# Altium PCB ACF_PCB.PcbDoc
Units mil, origin at the board's own origin, x right, y up, seen from the top; angles counter-clockwise.
Board outline 6000 x 4000 mil, 4 copper layers (Top Layer, Layer 1, Layer 2, Bottom Layer), stack 23.712 mil thick; 82 components, 43 nets, 231 pads, 0 vias.
Unrouted connection lines stored in the file: 172.
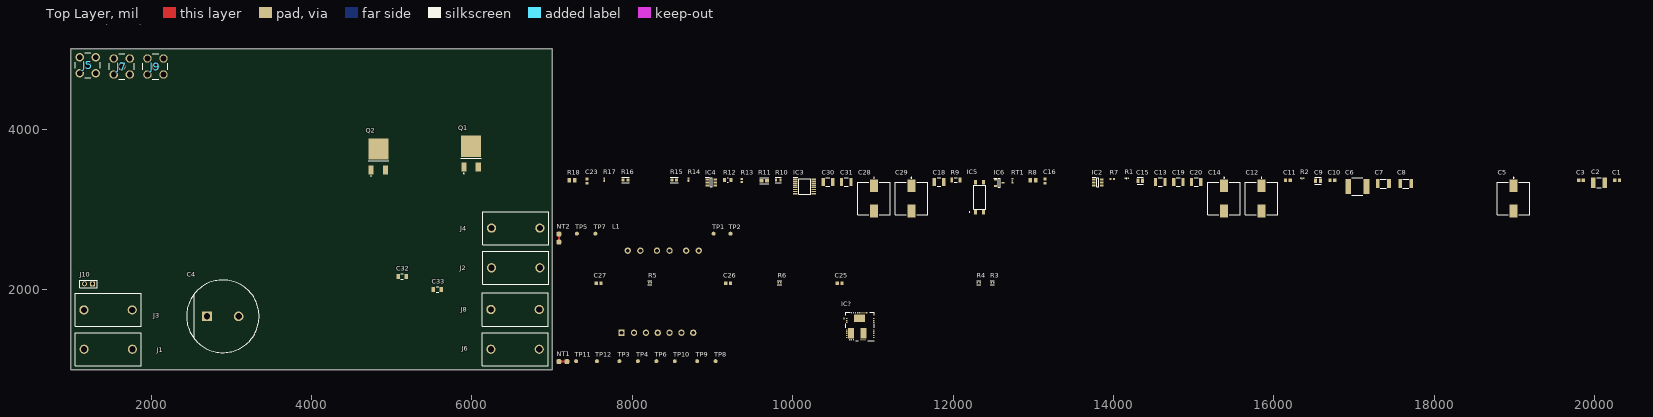
[diagram p0: Top Layer view]
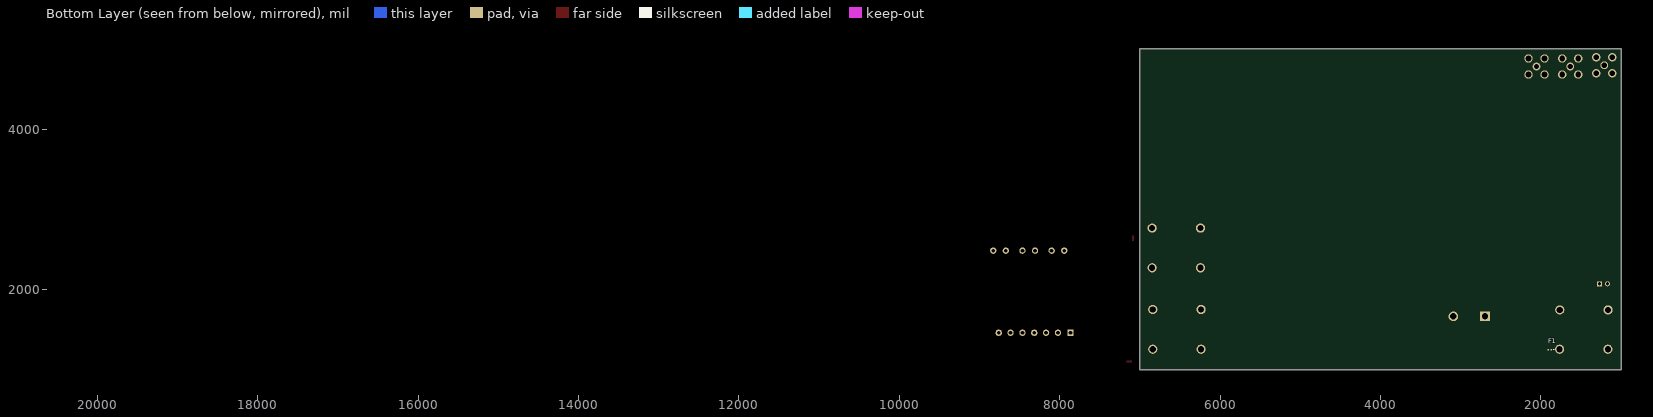
[diagram p1: Bottom Layer view, seen from below]

## Layer stack, top to bottom
Top Solder: solder mask 0.4, Solder Resist, Dk 3.5
Top Layer: signal copper 1.378
Dielectric 2: prepreg 2.8, PP-006, Dk 4.1
Layer 1: signal copper 1.378
Dielectric 1: dielectric 12.6, FR-4, Dk 4.8
Layer 2: signal copper 1.378
Dielectric 3: prepreg 2.8, PP-006, Dk 4.1
Bottom Layer: signal copper 1.378
Bottom Solder: solder mask 0.4, Solder Resist, Dk 3.5

## Board outline
1000,1000 7000,1000 7000,5000 1000,5000

## Design rules (kind name [scope] priority, off if disabled: settings)
Clearance [All] p1: gap=10 ignorepadtopadclearanceinfootprint=FALSE except(0: Arc-Hole Track-Hole SMDPad-Hole THPad-Hole Via-Hole Fill-Hole Poly-Hole Region-Hole Text-Hole)
PolygonConnect [All] p1: connectstyle=Relief reliefconductorwidth=10 reliefentries=4 polygonreliefangle="90 Angle" airgapwidth=10
RoomDefinition main [InComponentClass('main')] p1: confinementstyle=ConfineIn formatcopy=TRUE lockcomponents=FALSE outline 0,0 2000,0 2000,1000 0,1000
RoomDefinition in_out [InComponentClass('in_out')] p2: confinementstyle=ConfineIn formatcopy=TRUE lockcomponents=FALSE outline 0,0 2000,0 2000,1000 0,1000
RoutingVias [All] p1: holewidth=28 width=50 viastyle="Through Hole" minholewidth=28 minwidth=50 maxholewidth=28 maxwidth=50
SolderMaskExpansion [All] p1: expansion=4 istentingtop=FALSE
Width [All] p1: maxlimit=10 minlimit=10 preferedwidth=10
30 further rules are at their usual default settings.

## Classes and differential pairs
component class main: C1 C2 C3 C4 C5 C6 C7 C8 C9 C10 C11 C12 C13 C14 C15 C16 C17 C18 C19 C20 C21 C22 C23 C24 C28 C29 C30 C31 D1 IC2 IC3 IC4 IC5 IC6 IC? L1 NT2 Q1 Q2 R1 R2 R7 R8 R9 R10 R11 R12 R13 R14 R15 R16 R17 R18 RT1 TP1 TP2 TP5 TP7
component class in_out: C25 C26 C27 C32 C33 D2 D3 D4 F1 J1 J2 J3 J4 J5 J6 J7 J8 J9 J10 NT1 R3 R4 R5 R6 TP3 TP4 TP6 TP8 TP9 TP10 TP11 TP12

## Components (designator, comment, footprint, x,y, rotation, side; value= is the part's Value field where it differs from the comment)
C1 "0.1uF" CAPC1608X87X35ML15T15 20280,3360 r0 top
C2 "470nF/450V" CAPC4532X155X60LL30T35 20055,3330 r0 top
C3 "0.1uF" CAPC1608X87X35ML15T15 19830,3360 r0 top
C4 "100uF/450V" FP-EET-HC2G101BA-MFG 2895,1665 r0 top
C5 "10uF/450V" NIC-ULT2G100MNL1GS-2_V 18990,3135 r0 top
C6 "2.2uF//450V" FP-CKG57NX7T2W225M500JH-MFG 17040,3285 r0 top
C7 "100nF//450V" FP-CGA6P-IPC_A 17365,3320 r0 top
C8 "100nF/450V" FP-CGA6P-IPC_A 17645,3320 r0 top
C9 "10uF" FP-C0805C106K4PACTU-MFG 16550,3355 r0 top
C10 "0.1uF" CAPC1608X87X35ML15T15 16730,3360 r0 top
C11 "0.1uF" CAPC1608X87X35ML15T15 16175,3360 r0 top
C12 "470uF/35V" NIC-ULT2G100MNL1GS-2_V 15845,3135 r0 top
C13 "12105C105KAT2A" FP-1210-L_3_3_0_4-W_2_5_0-MFG 14585,3340 r0 top
C14 "470uF/35V" NIC-ULT2G100MNL1GS-2_V 15380,3135 r0 top
C15 "10uF" FP-C0805C106K4PACTU-MFG 14335,3355 r0 top
C16 "GRM1885C1H101JA01D" CAPC1608X90X35NL10T15 13145,3350 r90 top
C18 "12105C105KAT2A" FP-1210-L_3_3_0_4-W_2_5_0-MFG 11825,3340 r0 top
C19 "4.7uF/35V" FP-1210-L_3_3_0_4-W_2_5_0-MFG 14810,3340 r0 top
C20 "4.7uF/35V" FP-1210-L_3_3_0_4-W_2_5_0-MFG 15030,3340 r0 top
C23 "GRM1885C1H101JA01D" CAPC1608X90X35NL10T15 7435,3350 r90 top
C25 "0.1uF" CAPC1608X87X35ML15T15 10585,2075 r0 top
C26 "0.1uF" CAPC1608X87X35ML15T15 9195,2075 r0 top
C27 "0.1uF" CAPC1608X87X35ML15T15 7580,2075 r0 top
C28 "470uF/35V" NIC-ULT2G100MNL1GS-2_V 11015,3135 r0 top
C29 "470uF/35V" NIC-ULT2G100MNL1GS-2_V 11480,3135 r0 top
C30 "4.7uF/35V" FP-1210-L_3_3_0_4-W_2_5_0-MFG 10440,3340 r0 top
C31 "4.7uF/35V" FP-1210-L_3_3_0_4-W_2_5_0-MFG 10670,3340 r0 top
C32 "220p/500V" FP-CL31-IPC_C 5129.75,2160 r0 top
C33 "220p/500V" FP-CL31-IPC_C 5569.75,2000 r0 top
F1 "ERB-RD0R50X" ERBRD0R63X 1890,1250 r0 bottom
IC2 "SRK1000" SOT95P280X145-6N 13805,3335 r0 top
IC3 "NCP1568S02DBR2G" SOP65P640X135-16N 10150,3285 r0 top
IC4 "SRK1000" SOT95P280X145-6N 8985,3335 r0 top
IC5 "FODM1009R2V" FODM1009R2V 12330,3150 r0 top
IC6 "NCP431AVSNT1G" SOT96P237X111-3N 12575,3330 r0 top
IC? "MASTERGAN1" MASTERGAN1 10841.5,1540.2 r0 top
J1 "571-0100" 5710100 1165,1255 r0 top
J2 "571-0100" 5710100 6847.36,2270 r180 top
J3 "571-0100" 5710100 1162.64,1745 r0 top
J4 "571-0100" 5710100 6847.36,2765 r180 top
J5 "142-0701-301" 1420701301 1210,4795 r90 top
J6 "571-0100" 5710100 6840,1255 r180 top
J7 "142-0701-301" 1420701301 1635,4780 r90 top
J8 "571-0100" 5710100 6840,1750 r180 top
J9 "142-0701-301" 1420701301 2055,4780 r90 top
J10 "SSW-102-02-T-S" SMTC-SSW-102-02-X-S 1270,2070 r180 top
L1 "TI­E25­2x14­86W" TI­E25­2x14­86W 7865,1460 r90 top
NT1 "Net tie" "Net tie" 7085,1100 r0 top net-tie
NT2 "Net tie" "Net tie" 7085,2590 r90 top net-tie
Q1 "STD95N4F3" STD95N4F3 5990,3877.52 r0 top
Q2 "STD95N4F3" STD95N4F3 4835,3842.52 r0 top
R1 "" RESC0402(1005)_L 14165,3385 r0 top value=1k
R2 "20mR" RESC0402(1005)_L 16355,3385 r0 top value=1k
R3 "4.7k" FP-RG1005-IPC_C 12490,2085 r0 top
R4 "4.7k" FP-RG1005-IPC_C 12320,2085 r0 top
R5 "4.7k" FP-RG1005-IPC_C 8220,2085 r0 top
R6 "4.7k" FP-RG1005-IPC_C 9835,2085 r0 top
R7 "ERJ2RKF3300X" RESC1005X40X25ML05T05 13985,3380 r0 top
R8 "ERJ6ENF6802V" RESC2013X70X40NL20T20 12995,3360 r0 top
R9 "ERJ-8ENF1001V" RESC3216X70X50LL05T20 12035,3365 r0 top
R10 "1k" FP-RC0603-0_55-IPC_C 9820,3365 r0 top
R11 "13k" FP-ERA3A-IPC_A 9645,3355 r0 top
R12 "100k" FP-RN732A-MFG 9190,3365 r0 top value=100KΩ
R13 "ERJ2RKF3300X" RESC1005X40X25ML05T05 9365,3360 r90 top
R14 "" RESC0402(1005)_L 8700,3370 r90 top value=1k
R15 "56k" FP-ERJ3EK-IPC_B 8525,3365 r0 top
R16 "47k" FP-ERJ3G-IPC_B 7915,3365 r0 top
R17 "" RESC0402(1005)_L 7650,3370 r90 top value=1k
R18 "ERJ6ENF6802V" RESC2013X70X40NL20T20 7250,3360 r0 top
RT1 "NTCG104EF104FT1SX" THRMC1005X55N 12740,3355 r90 top
TP1 "*" "Test point" 9015,2695 r90 top
TP2 "*" "Test point" 9225,2695 r90 top
TP3 "Test point" "Test point" 7840,1105 r90 top
TP4 "Test point" "Test point" 8070,1105 r90 top
TP5 "*" "Test point" 7310,2695 r90 top
TP6 "Test point" "Test point" 8300,1105 r90 top
TP7 "*" "Test point" 7540,2695 r90 top
TP8 "Test point" "Test point" 9040,1105 r90 top
TP9 "Test point" "Test point" 8810,1105 r90 top
TP10 "Test point" "Test point" 8530,1105 r90 top
TP11 "Test point" "Test point" 7300,1105 r90 top
TP12 "Test point" "Test point" 7560,1105 r90 top

## Footprints (in the part's own frame and the unit in brackets; to place one, negate y for a bottom-side part, rotate by r counter-clockwise, add the part's x,y. Pads: shape width x height; smd on the part's side, far side on the other; paste and mask are expansions set on the pad)
5710100 [mm]
  round 2.91 hole 1.94: 1(0,0) 2(15.3,0)
  silkscreen extent -2.8,-5.25 18.1,5.25, body extent -5.19,-5.61 18.11,4.89, height 12.4
1420701301 [mil]
  round 97.52 hole 65: 1(0,0)
  round 105 hole 70: 2(-100,100) 3(-100,-100) 4(100,-100) 5(100,100)
  silkscreen extent -156,-156 156,156, body extent -150,-156 466,156, height 378
CAPC1608X87X35ML15T15 [mm] "Chip Capacitor, 2-Leads, Body 1.60x0.80mm, IPC Low Density"
  rect 1x1.1 smd: 1(-0.725,0) 2(0.725,0)
  body extent -0.87,-0.48 0.87,0.47, height 0.87
CAPC1608X90X35NL10T15 [mm] "Chip Capacitor, 2-Leads, Body 1.60x0.80mm, IPC Medium Density"
  rect 0.85x0.95 smd: 1(-0.675,0) 2(0.675,0)
  body extent -0.85,-0.45 0.85,0.45, height 0.9
CAPC4532X155X60LL30T35 [mm] "Chip Capacitor, 2-Leads, Body 4.8x3.5mm, IPC High Density"
  rect 1.4x3.4 smd: 1(-1.85,0) 2(1.85,0)
  silkscreen extent -0.75,-1.6 0.75,1.6, body extent -2.4,-1.75 2.4,1.75, height 1.55
ERBRD0R63X [mm]
  rect 0.475x0.5 smd: 1(-0.513,0) 2(0.513,0)
  silkscreen extent -1.3,-0.05 -1.2,0.05, body extent -0.7,-0.25 0.7,0.25, height 0.59
FODM1009R2V [mm]
  rect 0.9x1.3 smd: 1(-1.27,-4.75) 2(1.27,-4.75) 3(1.27,4.75) 4(-1.27,4.75)
  silkscreen extent -3.25,-4.7 1.9,3.75
FP-1210-L_3_3_0_4-W_2_5_0-MFG [mm]
  rect 1x2.5 smd paste+0 mask+0: 1(-1.5,0) 2(1.5,0)
  silkscreen extent -0.63,-1.4 0.63,1.4, body extent -2.1,-1.5 2.1,1.5, height 0.25
FP-C0805C106K4PACTU-MFG [mm]
  rect 0.95x1.35 smd paste+0 mask+0: 1(-0.75,0) 2(0.75,0)
  silkscreen extent -1,-1.12 1,1.12, body extent -1.4,-0.85 1.4,0.85, height 0.25
FP-CGA6P-IPC_A [mm]
  rect 1.153x2.904 smd paste+0 mask+0: 1(-1.775,0) 2(1.775,0)
  silkscreen extent -0.9,-1.45 0.9,1.45, body extent -2.85,-1.95 2.85,1.95, height 0.25
FP-CKG57NX7T2W225M500JH-MFG [mm]
  rect 1.75x4.75 smd paste+0 mask+0: 1(-2.925,0) 2(2.925,0)
  silkscreen extent -1.68,-2.75 1.68,2.75, body extent -3.9,-2.85 3.9,2.85, height 0.25
FP-CL31-IPC_C [mil]
  rect 43.52x65.28 smd paste+0 mask+0: 1(-50.25,0) 2(50.25,0)
  silkscreen extent -17,-34 17,34, body extent -76,-38 76,38, height 10
FP-EET-HC2G101BA-MFG [mm]
  rect 3.05x3.05 hole 2 paste-1000 mask+0: 1(-5,0)
  round 3.05 hole 2 paste-1000 mask+0: 2(5,0)
  silkscreen extent -11.5,-11.5 11.5,11.5, body extent -11.6,-11.6 11.6,11.6, height 0.25
FP-ERA3A-IPC_A [mil]
  rect 49.41x43.55 smd paste+0 mask+0: 1(-32.51,0) 2(32.51,0)
  silkscreen extent -57,-38 57,38, body extent -77,-41 77,41, height 10
FP-ERJ3EK-IPC_B [mil]
  rect 37.66x37.88 smd paste+0 mask+0: 1(-29.56,0) 2(29.56,0)
  silkscreen extent -48,-35 48,35, body extent -58,-29 58,29, height 10
FP-ERJ3G-IPC_B [mil]
  rect 37.66x37.88 smd paste+0 mask+0: 1(-29.56,0) 2(29.56,0)
  silkscreen extent -48,-35 48,35, body extent -58,-29 58,29, height 10
FP-RC0603-0_55-IPC_C [mil]
  rect 25.93x31.97 smd paste+0 mask+0: 1(-26.64,0) 2(26.64,0)
  silkscreen extent -40,-33 40,33, body extent -44,-22 44,22, height 10
FP-RG1005-IPC_C [mil]
  rect 19.24x18.6 smd paste+0 mask+0: 1(-16.28,0) 2(16.28,0)
  silkscreen extent -26,-27 26,27, body extent -30,-15 30,15, height 10
FP-RN732A-MFG [mm]
  rect 1x1.35 smd paste+0 mask+0: 1(-1,0) 2(1,0)
  silkscreen extent -0.13,-0.7 0.13,0.7, body extent -1.6,-0.8 1.6,0.8, height 0.25
MASTERGAN1 [mm]
  rect 0.5x0.35 smd: 1(-4.28,2.5) 2(-4.28,1.9) 3(-4.28,1.3) 4(-4.28,-1.1) 5(-4.28,-1.7) 6(-4.28,-2.3) 7(-4.28,-2.9) 8(-4.28,-3.5) 15(4.28,-3.5) 16(4.28,-2.9) 17(4.28,-2.3) 18(4.28,-1.7) 19(4.28,-1.1) 20(4.28,1.3) 21(4.28,1.9) 22(4.28,2.5)
  rect 0.35x0.5 smd: 9(-3.305,-4.29) 10(-2.705,-4.29) 11(-2.105,-4.29) 12(0.3,-4.29) 13(0.9,-4.29) 14(1.5,-4.29) 23(2.1,4.29) 24(1.5,4.29) 25(0.9,4.29) 26(0.3,4.29) 27(-0.3,4.29) 28(-0.9,4.29) 29(-1.5,4.29) 30(-2.1,4.29) 31(-2.7,4.29)
  rect 3.5x2.26 smd: MP1(-0.25,2.57)
  rect 1.9x3.25 smd: MP2(-2.88,-2.215) MP3(1.05,-2.215)
  silkscreen extent -5.2,-4.5 4.5,4.5, body extent -4.5,-4.5 4.5,4.5, height 1.1
"Net tie" [mil] "Net tie - SMD short"
  rrect50% 60x60 smd: 1(0,0) 2(100,0)
  Top Layer region: 20,10 80,10 80,-10 20,-10 20,-10
NIC-ULT2G100MNL1GS-2_V [mm] "SMD, 2-Leads, Body 10.3x10.3mm, Height 14.5mm"
  rect 2.5x4 smd: 1(0,4) 2(0,-4)
  silkscreen extent -5.15,-5.15 5.15,6.67, body extent -5.15,-5.65 5.15,5.66, height 14.5
RESC0402(1005)_L [mm] "Chip Resistor, Body 1.0x0.5mm, IPC High Density"
  rrect25% 0.5x0.55 smd: 1(-0.45,0) 2(0.45,0)
  silkscreen extent 0,-0.2 0,0.2, body extent -0.5,-0.25 0.5,0.25, height 0.3
RESC1005X40X25ML05T05 [mm] "Chip Resistor, 2-Leads, Body 1.00x0.50mm, IPC Low Density"
  rect 0.65x0.65 smd: 1(-0.5,0) 2(0.5,0)
  body extent -0.53,-0.27 0.53,0.28, height 0.4
RESC2013X70X40NL20T20 [mm] "Chip Resistor, 2-Leads, Body 2.00x1.25mm, IPC Medium Density"
  rect 1.15x1.45 smd: 1(-0.875,0) 2(0.875,0)
  body extent -1.1,-0.72 1.1,0.72, height 0.7
RESC3216X70X50LL05T20 [mm] "Chip Resistor, 2-Leads, Body 3.20x1.60mm, IPC High Density"
  rect 0.9x1.55 smd: 1(-1.325,0) 2(1.325,0)
  silkscreen extent -0.5,-0.67 0.5,0.67, body extent -1.63,-0.82 1.62,0.82, height 0.7
SMTC-SSW-102-02-X-S [mm] "SQ Post Socket, 1x2 Pins, Vertical, 2.54mm Pitch, Female"
  rect 1.55x1.55 hole 1.04: 1(0,0)
  round 1.55 hole 1.04: 2(2.54,0)
  silkscreen extent -1.53,-1.2 4.07,1.2, body extent -1.52,-1.21 4.06,1.21, height 8.51
SOP65P640X135-16N [mm]
  rect 1.45x0.45 smd: 1(-2.925,2.275) 2(-2.925,1.625) 3(-2.925,0.975) 4(-2.925,0.325) 5(-2.925,-0.325) 6(-2.925,-0.975) 7(-2.925,-1.625) 8(-2.925,-2.275) 9(2.925,-2.275) 10(2.925,-1.625) 11(2.925,-0.975) 12(2.925,-0.325) 13(2.925,0.325) 14(2.925,0.975) 15(2.925,1.625) 16(2.925,2.275)
  silkscreen extent -3.65,-2.5 1.85,2.85, body extent -3.2,-2.5 3.2,2.5, height 1.35
SOT95P280X145-6N [mm]
  rect 1.15x0.6 smd: 1(-1.25,0.95) 2(-1.25,0) 3(-1.25,-0.95) 4(1.25,-0.95) 5(1.25,0) 6(1.25,0.95)
  silkscreen extent -1.83,-1.45 0.33,1.6, body extent -1.4,-1.45 1.4,1.45, height 1.45
SOT96P237X111-3N [mm]
  rect 1x0.6 smd: 1(-1.2,0.955) 2(-1.2,-0.955) 3(1.2,0)
  silkscreen extent -1.7,-1.46 0.35,1.51, body extent -1.18,-1.46 1.18,1.46, height 1.11
STD95N4F3 [mm]
  rect 1.6x2.9 smd: 1(-2.286,-8.95) 3(2.286,-8.95)
  rect 6.3x6.7 smd: 4(0,-2.35)
  silkscreen extent -3.25,-11 3.25,-6.1
"Test point" [mil] "Test point SMD, 50 mil"
  round 50 smd: 1(0,0)
THRMC1005X55N [mm]
  rect 0.55x0.6 smd: 1(-0.65,0) 2(0.65,0)
  silkscreen extent 0,-0.15 0,0.15, body extent -0.5,-0.25 0.5,0.25, height 0.55
TI­E25­2x14­86W [mm] "tRANSFORMER"
  rect 2x2 hole 1.2: 1(0,0)
  round 2 hole 1.2: 2(0,-4) 3(0,-7.75) 4(0,-11.5) 5(0,-15.25) 6(0,-19) 7(0,-22.75) 8(26,-24.5) 9(26,-20.5) 10(26,-15.25) 11(26,-11.25) 12(26,-6) 13(26,-2)
  body extent -3.28,-27.2 29.28,0.5, height 25.55

## Part data
C1 C3 C10 C11 C25 C26 C27: library part CMP-2006-03059-1, "CAP CER 0.1uF 16V X7    R 0603", Manufacturer=Kemet, Part Number=C0603C104K4RALTU
C2: library part CMP-2000-06034-1, Capacitance=0.047µF, Manufacturer=Kemet, Operating Temperature=-55°C~125°C, Package / Case=1812(4532Metric), Package Description="2-Pin Surface Mount Device, Body 4.5 x 3.2 mm", Package Reference=1812, Ratings=-, Standard Package=1, Temperature Coefficient=X7R, Tolerance=±10%, Voltage - Rated=500V, Applications=SMPSFiltering, Catalog Drawings=ACTU_1812, Category=Capacitors, Datasheet URL=http://capacitoredge.kemet.com/capedge2/DataSheet/Datasheet-C1812C473KCRACTU.pdf?pn=C1812C473KCRACTU, Datasheet Version=09/2016, Family=CeramicCapacitors, Features=HighVoltage, Height - Seated (Max)=-, Kits=399-5086-ND-KITCERHI-VOLTAGECAPS, Lead Spacing=-, Lead Style=-, Manufacturer URL=http://www.kemet.com/, Mounting Technology=SurfaceMount, Mounting Type=SurfaceMount,MLCC, Online Catalog=X7RDielectricHighVoltage, Other Names=399-3453-1, Packaging=CutTape(CT), Product Training Modules=CapacitorBasics-TypicalUsesforCapacitors, Series=C, Size / Dimension="0.177\"Lx0.126\"W(4.50mmx3.20mm)", Thickness (Max)="0.061\"(1.55mm)"
C4: library part CMP-05427-000022-1, "CAP ALUM 100UF 20% 400V SNAP", Capacitance=100uF, Case/Package=Radial, Dielectric Material=Aluminium, ESR (Equivalent Series Resistance)=1.824R, Max Operating Temperature=105°C, Min Operating Temperature=-25°C, Package Quantity=200, Ripple Current=700mA, Test Frequency=120Hz, Tolerance=20%, Voltage=400V, Diameter=22mm, Dissipation Factor=15%, Features="General Purpose", Height=25mm, Height - Seated (Max)=0.984inch, Hole Diameter=2mm, Lead Diameter=0.8mm, Lead Pitch=10mm, Length=25mm, Life (Hours)=2000Hour, Mount="Through Hole", Number of Pins=2, Packaging=Bulk, Radiation Hardening=No, REACH SVHC="No SVHC", Ripple Current (AC)=700mA, RoHS Compliant=Yes, Series=TS-HC, Termination="Snap in", Voltage Rating=400V, Voltage Rating (DC)=400V
C5 C12 C29: library part CMP-0742-00001-1, "Aluminum Electrolytic Capacitor, 400 V, 10 uF, -40 to 125 degC, 2-Pin 10.3 Dia x 14.5 mm SMD, RoHS, Tape and Reel", Capacitance Tolerance="+/- 20%", Category Temperature Range="-40 to 125 degC", Leakage Current (Short Term)="1700 mA", Manufacturer=Nichicon, PartNumber=ULT2G100MNL1GS, Rated Capacitance="10 uF", Rated Ripple Current (at 100kHz)="75 mA", Rated Ripple Current (at 120Hz)="50 mA", Rated Voltage="400 V", ComponentLink1Description="Manufacturer URL", ComponentLink1URL=http://www.nichicon.co.jp/, ComponentLink2Description=Datasheet, ComponentLink2URL=http://nichicon-us.com/english/products/pdfs/e-lt.pdf, ComponentLink3Description="Package Specification", ComponentLink3URL=http://nichicon-us.com/english/products/alm_chip/pict_f.htm, DatasheetVersion=Sep-13, Diameter="10 mm", Endurance Time=2000h, Length="13.5 mm", Mounting Technology="Surface Mount", PackageDescription="2-Pin SMD, Body 10.3 x 10.3 mm, Height 14.5 mm", PackageReference=ULT2G100MNL1GS-2, PackageVersion=Sep-13, Packing="Tape and Reel", RoHS=TRUE
C6: library part CMP-08246-004348-1, "CAP CER 2.2UF 450V X7T SMD", Capacitance=2.2uF, Case Code (Imperial)=2220, Case Code (Metric)=5750, Dielectric=X7T, Max Operating Temperature=125°C, Min Operating Temperature=-55°C, Package Quantity=1, Resistor Type=Ceramic, Tolerance=20%, Voltage Rating=450V, Case/Package=2220, Depth=5mm, Height=5mm, Lead/Base Style=L-Lead, Length=6mm, Mount="Surface Mount", Packaging="Tape and Reel", REACH SVHC="No SVHC", RoHS Compliant=Yes, Series="CKG, Megacap", Termination=Metal, Thickness=0.217inch, Voltage Rating (DC)=450V, Weight=0.016932oz, Width=0.197inch
C7 C8: library part CMP-08246-002261-1, "Cap Ceramic 100nF 630V X7T 10% Pad SMD 1210 +125°C Automotive T/R", Capacitance=100nF, Case Code (Imperial)=1210, Case Code (Metric)=3225, Dielectric=X7T, Max Operating Temperature=125°C, Min Operating Temperature=-55°C, Package Quantity=1, Ratings=AEC-Q200, Tolerance=10%, Voltage Rating=630V, Case/Package=1210, Depth=2.5mm, Features="Soft Termination", Height=1.6mm, Length=3.2mm, Mount="Surface Mount", Packaging="Tape and Reel", Termination=SMD/SMT, Thickness=0.075inch, Voltage Rating (DC)=630V, Weight=0.000564oz, Width=0.098inch
C9 C15: library part CMP-03020-034671-1, "CAP CER 10UF 16V X5R 0805", Case Code (Imperial)=0805, Case Code (Metric)=2012, Dielectric=X5R, Dielectric Material=Ceramic, Max Operating Temperature=85°C, Min Operating Temperature=-55°C, Package Quantity=1, Tolerance=10%, Voltage=16V, Capacitance=10uF, Case/Package=0805, Construction=Flat, Contact Plating=Tin, Depth=1.25mm, Dissipation Factor=5%, Height=1.25mm, Lead Free="Lead Free", Length=2mm, Mount="Surface Mount", Number of Pins=2, Packaging="Tape and Reel", Radiation Hardening=No, REACH SVHC="No SVHC", Series=C, Termination=SMD/SMT, Thickness=0.055inch, Voltage Rating=16V, Voltage Rating (DC)=16V, Width=0.049inch
C13 C18: library part CMP-04427-011162-1, "General Purpose Ceramic Capacitor, 1210, 1uF, 10%, X7R, 15%, 50V", Capacitance=1uF, Case Code (Imperial)=1210, Case Code (Metric)=3225, Dielectric=X7R, Insulation Resistance=100GR, Max Operating Temperature=125°C, Min Operating Temperature=-55°C, Package Quantity=1, Tolerance=10%, Voltage=50V, Case/Package=1210, Construction=Flat, Contact Plating=Tin, Depth=2.5mm, Dissipation Factor=10%, Height=2.29mm, Lead Free="Lead Free", Length=3.2mm, Mount="Surface Mount", Packaging="Tape and Reel", Radiation Hardening=No, REACH SVHC="No SVHC", RoHS Compliant=Yes, Series=-, Termination=SMD/SMT, Thickness=0.09inch, Voltage Rating=50V, Voltage Rating (DC)=50V, Width=0.098inch
C14 C28: library part CMP-0742-00001-1, Capacitance Tolerance="+/- 20%", Category Temperature Range="-40 to 125 degC", Leakage Current (Short Term)="1700 mA", Manufacturer=Nichicon, PartNumber=ULT2G100MNL1GS, Rated Capacitance="10 uF", Rated Ripple Current (at 100kHz)="75 mA", Rated Ripple Current (at 120Hz)="50 mA", Rated Voltage="400 V", ComponentLink1Description="Manufacturer URL", ComponentLink1URL=http://www.nichicon.co.jp/, ComponentLink2Description=Datasheet, ComponentLink2URL=http://nichicon-us.com/english/products/pdfs/e-lt.pdf, ComponentLink3Description="Package Specification", ComponentLink3URL=http://nichicon-us.com/english/products/alm_chip/pict_f.htm, DatasheetVersion=Sep-13, Diameter="10 mm", Endurance Time=2000h, Length="13.5 mm", Mounting Technology="Surface Mount", PackageDescription="2-Pin SMD, Body 10.3 x 10.3 mm, Height 14.5 mm", PackageReference=ULT2G100MNL1GS-2, PackageVersion=Sep-13, Packing="Tape and Reel", RoHS=TRUE
C16 C23: library part CMP-2006-02595-1, Manufacturer=Murata, Part Number=GRM1885C1H101JA01D
C19 C20 C30 C31: library part CMP-04427-011162-1, Capacitance=1uF, Case Code (Imperial)=1210, Case Code (Metric)=3225, Dielectric=X7R, Insulation Resistance=100GR, Max Operating Temperature=125°C, Min Operating Temperature=-55°C, Package Quantity=1, Tolerance=10%, Voltage=50V, Case/Package=1210, Construction=Flat, Contact Plating=Tin, Depth=2.5mm, Dissipation Factor=10%, Height=2.29mm, Lead Free="Lead Free", Length=3.2mm, Mount="Surface Mount", Packaging="Tape and Reel", Radiation Hardening=No, REACH SVHC="No SVHC", RoHS Compliant=Yes, Series=-, Termination=SMD/SMT, Thickness=0.09inch, Voltage Rating=50V, Voltage Rating (DC)=50V, Width=0.098inch
C32 C33: library part CMP-13271-001211-1, Capacitance=220pF, Case/Package=1206, Dielectric=C0G, Max Operating Temperature=125°C, Min Operating Temperature=-55°C, Package Quantity=10000, Tolerance=5%, Voltage Rating=500V, Depth=1.6mm, Height=1.25mm, Length=3.2mm, Mount="Surface Mount", Packaging="Tape and Reel", Radiation Hardening=No, Thickness=0.055inch, Voltage Rating (DC)=500V, Width=0.063inch
F1: "Fuse", Manufacturer_Name=Panasonic, Mouser Part Number=667-ERB-RD0R50X, Arrow Part Number=ERB-RD0R50X, Arrow Price/Stock=https://www.arrow.com/en/products/erbrd0r50x/panasonic?region=nac, Datasheet Link=https://industrial.panasonic.com/cdbs/www-data/pdf/AFA0000/AFA0000C7.pdf, Height=0.49mm, Manufacturer_Part_Number=ERB-RD0R50X, Mouser Price/Stock=https://www.mouser.co.uk/ProductDetail/Panasonic/ERB-RD0R50X?qs=1Gb%2FpduDpOBineVwblCDKg%3D%3D
IC2 IC4: "Integrated Circuit", Manufacturer_Name=STMicroelectronics, Mouser Part Number=511-SRK1000, Arrow Part Number=SRK1000, Arrow Price/Stock=https://www.arrow.com/en/products/srk1000/stmicroelectronics, Datasheet Link=https://www.st.com/resource/en/datasheet/srk1000.pdf, Height=1.45mm, Manufacturer_Part_Number=SRK1000, Mouser Price/Stock=https://www.mouser.co.uk/ProductDetail/STMicroelectronics/SRK1000?qs=byeeYqUIh0P1pUk%2FLXsjaA%3D%3D
IC3: "Integrated Circuit", Manufacturer_Name=onsemi, Mouser Part Number=863-NCP1568S02DBR2G, Arrow Part Number=NCP1568S02DBR2G, Arrow Price/Stock=https://www.arrow.com/en/products/ncp1568s02dbr2g/on-semiconductor?region=nac, Datasheet Link=https://datasheet.datasheetarchive.com/originals/distributors/Datasheets_SAMA/e6c73cfd9b14743cc4dd16ca5df3e455.pdf, Height=1.35mm, Manufacturer_Part_Number=NCP1568S02DBR2G, Mouser Price/Stock=https://www.mouser.co.uk/ProductDetail/onsemi/NCP1568S02DBR2G?qs=BJlw7L4Cy7%252Bni9d8vX6s0A%3D%3D
IC5: "Integrated Circuit", Manufacturer_Name=onsemi, Mouser Part Number=863-FODM1009R2V, Arrow Part Number=FODM1009R2V, Arrow Price/Stock=https://www.arrow.com/en/products/fodm1009r2v/on-semiconductor?region=nac, Datasheet Link=https://componentsearchengine.com/Datasheets/1/FODM1009R2V.pdf, Height=2.4mm, Manufacturer_Part_Number=FODM1009R2V, Mouser Price/Stock=https://www.mouser.co.uk/ProductDetail/onsemi/FODM1009R2V?qs=d0WKAl%252BL4Kbb4VetG0t5Tw%3D%3D
IC6: "Integrated Circuit", Manufacturer_Name=onsemi, Mouser Part Number=863-NCP431AVSNT1G, Arrow Part Number=NCP431AVSNT1G, Arrow Price/Stock=https://www.arrow.com/en/products/ncp431avsnt1g/on-semiconductor, Datasheet Link=http://www.onsemi.com/pub/Collateral/NCP431-D.PDF, Height=1.11mm, Manufacturer_Part_Number=NCP431AVSNT1G, Mouser Price/Stock=https://www.mouser.com/Search/Refine.aspx?Keyword=863-NCP431AVSNT1G
IC?: "Integrated Circuit", Manufacturer_Name=STMicroelectronics, Mouser Part Number=511-MASTERGAN1, Arrow Part Number=MASTERGAN1, Arrow Price/Stock=https://www.arrow.com/en/products/mastergan1/stmicroelectronics?region=nac, Datasheet Link=https://www.mouser.com/datasheet/2/389/mastergan1-1893186.pdf, Height=1mm, Manufacturer_Part_Number=MASTERGAN1, Mouser Price/Stock=https://www.mouser.co.uk/ProductDetail/STMicroelectronics/MASTERGAN1?qs=hWgE7mdIu5TUQlvSzk235A%3D%3D
J1 J2 J3 J4 J6 J8: library part CMP-017-000000-1, "Connector", Manufacturer_Name="DELTRON COMPONENTS", Mouser Part Number=164-6218, Datasheet Link=https://www.dem-uk.com/deltron-components/Data/Product_Downloads/deltron-571-0100-4mm-90deg-single-socket-data.pdf, Design Item ID=571-0100, Height=12.4mm, Manufacturer_Part_Number=571-0100, Mouser Price/Stock=https://www.mouser.co.uk/ProductDetail/Deltron/571-0100?qs=E2gf03EXmtoqC8%2FBhoPdrg%3D%3D, Source=KN_ECART.SchLib
J5 J7 J9: library part CMP-017-000001-1, "Connector", Manufacturer_Name="Cinch Connectivity Solutions", Mouser Part Number=530-142-0701-301, Arrow Part Number=142-0701-301, Arrow Price/Stock=https://www.arrow.com/en/products/142-0701-301/cinch-connectivity-solutions?region=nac, Datasheet Link=https://datasheet.datasheetarchive.com/originals/distributors/Datasheets_SAMA/2ec9b041f970d014d2778887508fd87c.pdf, Design Item ID=142-0701-301, Height=9.779mm, Manufacturer_Part_Number=142-0701-301, Mouser Price/Stock=https://www.mouser.co.uk/ProductDetail/Johnson-Cinch-Connectivity-Solutions/142-0701-301?qs=VqHsQWpF6un5h9kBF%252BTxDw%3D%3D, Source=KN_ECART.SchLib
J10: library part CMP-1023-00323-1, "SQ Post Socket, Through-hole, Vertical, -55 to 105 degC, 2.54 mm Pitch, 2-Pin, Female, RoHS", Manufacturer=Samtec, Temperature Range="-55 to 105 degC", ComponentLink1Description="Manufacturer URL", ComponentLink1URL=http://www.samtec.com, ComponentLink2Description=Datasheet, ComponentLink2URL=http://www.samtec.com/documents/webfiles/pdf/SSW_TH.PDF, ComponentLink3Description="Package Specification", ComponentLink3URL=http://www.samtec.com/documents/webfiles/cpdf/SSW-1XX-XX-XXX-X-XX-XXX-XX-MKT.pdf, DatasheetVersion=F-214, Mounting Technology=Through-hole, Orientation=Vertical, PackageDescription="Assembly, Socket Strip .016 X .031 Tail", PackageReference=SSW-102-02-X-S, PackageVersion="CA, 6/1987", PartNumber=SSW-102-02-T-S, Pitch="2.54 mm", RoHS=True
L1: "Transformer"
Q1 Q2: "MOSFET (N-Channel)", Manufacturer_Name=STMicroelectronics, Mouser Part Number=511-STD95N4F3, Arrow Part Number=STD95N4F3, Arrow Price/Stock=https://www.arrow.com/en/products/std95n4f3/stmicroelectronics, Datasheet Link=https://www.st.com/resource/en/datasheet/std95n4f3.pdf, Height=2.4mm, Manufacturer_Part_Number=STD95N4F3, Mouser Price/Stock=https://www.mouser.co.uk/ProductDetail/STMicroelectronics/STD95N4F3?qs=Djavi1aLnwoepdJqDxyf1g%3D%3D
R1 R2 R14 R17: library part CMP-009-00075-2, Case/Package=0402, Power=63mW, Tolerance=5%, Mounting Technology=SMT, Pins=2
R3 R4 R5 R6: library part CMP-2002-01481-2, "Automotive Metal Thin Film Chip Resistor, 0402, 604Ω, 0.1%, 25ppm/°C, 0.0625W, 75V", Case Code (Imperial)=0402, Case Code (Metric)=1005, Max Operating Temperature=155°C, Max Power Dissipation=63mW, Min Operating Temperature=-55°C, Package Quantity=1, Power Rating=30mW, Resistance=604R, Resistor Type="Thin Film", Temperature Coefficient=25ppm/°C, Tolerance=0.1%, Voltage Rating=25V, Case/Package=0402, Features="Automotive AEC-Q200", Height=0.016inch, Lead Free="Lead Free", Length=0.039inch, Number of Terminations=2, Packaging="Tape and Reel", RoHS Compliant=Yes, Series=RG, Size Code=0402, Termination=SMD/SMT, Voltage Rating (DC)=25V, Width=0.5mm
R7 R13: library part CMP-2002-01143-1, Manufacturer=Panasonic, Part Number=ERJ2RKF3300X
R8 R18: library part CMP-2001-00568-1, Manufacturer=Panasonic, Part Number=ERJ6ENF6802V
R9: library part CMP-2003-00017-1, Manufacturer=Panasonic, Part Number=ERJ-8ENF1001V
R10: library part CMP-1659-00009-5, "RES 1K OHM 1% 1/10W 0603", Case Code (Imperial)=0603, Case Code (Metric)=1608, Max Operating Temperature=155°C, Max Power Dissipation=100mW, Min Operating Temperature=-55°C, Resistance=1kR, Resistance Tolerance=1%, Resistor Type="Thick Film", Temperature Coefficient=100ppm/°C, Voltage Rating=50V, Case/Package=0603, Construction=Rectangular, Contact Plating=Tin, Depth=0.8mm, Features="Moisture Resistant", Height=0.45mm, Lead Free="Lead Free", Length=1.6mm, Military Standard=Not, Number of Terminations=2, Packaging="Tape and Reel", Power Rating=100mW, Radiation Hardening=No, REACH SVHC="No SVHC", RoHS Compliant=Yes, Series=RC, Size Code=0603, Technology="THICK FILM", Termination=SMD/SMT, Tolerance=1%
R11: library part CMP-2000-00907-2, "RES SMD 13K OHM 0.1% 1/10W 0603", Case Code (Imperial)=0603, Case Code (Metric)=1608, Max Operating Temperature=155°C, Max Power Dissipation=100mW, Min Operating Temperature=-55°C, Package Quantity=1, Resistance=13kR, Resistance Tolerance=0.1%, Resistor Type="Metal Film", Temperature Coefficient=25ppm/°C, Voltage Rating=75V, Case/Package=0603, Construction=Rectangular, Contact Plating=Tin, Depth=0.8mm, Features="Automotive AEC-Q200", Height=0.45mm, Lead Free="Lead Free", Length=1.6mm, Military Standard=Not, Mount="Surface Mount", Number of Pins=2, Number of Terminations=2, Packaging="Tape and Reel", Power Rating=100mW, Radiation Hardening=No, REACH SVHC="No SVHC", RoHS Compliant=Yes, Series=ERA-3A, Technology="THIN FILM", Termination=SMD/SMT, Tolerance=0.1%, Voltage Rating (DC)=75V, Width=0.8mm
R12: library part CMP-03211-002801-1, "SMD Chip Resistor, Thin Film, 100KΩ, 100 V, 0805 [2012 Metric], 100 mW, 0.1%, RN73 Series", Manufacturer="TE Connectivity", Manufacturer Part Number=RN73C2A100KBTDF, Package=RN732A, Power Rating=0.1W, Resistance=100KΩ, Temperature="-55°C to 155°C", Temperature Coefficient=10ppm/°C, Temperature Range High=155°C, Temperature Range Low=-55°C, Tolerance=0.1%, Voltage Rating=100V, Automotive=No, Category=Res, ComponentLink2Description=Datasheet, ComponentLink2URL=https://www.te.com/commerce/DocumentDelivery/DDEController?Action=showdoc&DocId=Data+Sheet%7F1773270%7FP%7Fpdf%7FEnglish%7FENG_DS_1773270_P.pdf%7F1676162-2, Composition="Thin Film", Device Class L1="Passive Components", Device Class L2=Resistors, Device Class L3="Chip SMD Resistors", Height=0.65mm, Ipc Land Pattern Name=RESC200125X55, Lead Free=Yes, Octopart=https://octopart.com/rn73c2a100kbtdf-te+connectivity-21411916, octopart_url=https://octopart.com/rn73c2a100kbtdf-te+connectivity-21411916, Packaging="1000 Reel", RoHS=TRUE, Series=RN73
R15: library part CMP-2000-00566-2, "RES SMD 56K OHM 1% 1/10W 0603", Case Code (Imperial)=0603, Case Code (Metric)=1608, Max Operating Temperature=155°C, Max Power Dissipation=100mW, Min Operating Temperature=-55°C, Package Quantity=1, Resistance=56kR, Resistance Tolerance=1%, Resistor Type="Thick Film", Temperature Coefficient=100ppm/°C, Voltage Rating=75V, Case/Package=0603, Construction=Rectangular, Contact Plating=Tin, Depth=0.8mm, Features="Automotive AEC-Q200", Height=0.022inch, Lead Free="Lead Free", Length=1.6mm, Military Standard=Not, Mount="Surface Mount", Number of Pins=2, Number of Terminations=2, Packaging="Tape and Reel", Power Rating=100mW, Radiation Hardening=No, REACH SVHC="No SVHC", RoHS Compliant=Yes, Series=ERJ, Size Code=0603, Termination=SMD/SMT, Tolerance=1%, Voltage Rating (DC)=75V, Width=0.8mm
R16: library part CMP-1012-00114-3, "RES SMD 47K OHM 5% 1/10W 0603", Case Code (Imperial)=0603, Case Code (Metric)=1608, Max Operating Temperature=155°C, Max Power Dissipation=100mW, Min Operating Temperature=-55°C, Package Quantity=1, Resistance=47kR, Resistance Tolerance=5%, Resistor Type="Thick Film", Temperature Coefficient=200ppm/°C, Voltage Rating=75V, Voltage Rating (DC)=50V, Case/Package=0603, Construction=Rectangular, Contact Plating=Tin, Depth=0.8mm, Features="Automotive AEC-Q200", Height=0.45mm, Lead Free="Lead Free", Length=1.6mm, Military Standard=Not, Mount="Surface Mount", Number of Terminations=2, Packaging="Tape and Reel", Power Rating=100mW, Radiation Hardening=No, REACH SVHC="No SVHC", RoHS Compliant=Yes, Series=ERJ, Technology="THICK FILM", Termination=SMD/SMT, Tolerance=5%, Width=0.031inch, Working Voltage=75V
RT1: "Thermistor", Manufacturer_Name=TDK, Mouser Part Number=810-NTC104EF104FT1SX, Arrow Part Number=NTCG104EF104FT1SX, Arrow Price/Stock=https://www.arrow.com/en/products/ntcg104ef104ft1sx/tdk, Datasheet Link=https://product.tdk.com/system/files/dam/doc/product/sensor/ntc/chip-ntc-thermistor/catalog/tpd_automotive_ntc-thermistor_ntcg_en.pdf, Height=0.55mm, Manufacturer_Part_Number=NTCG104EF104FT1SX, Mouser Price/Stock=https://www.mouser.co.uk/ProductDetail/TDK/NTCG104EF104FT1SX?qs=cNoPOocMWw25zdFQn%252B2tmg%3D%3D
TP1 TP2 TP5 TP7: library part "Test point"

## Nets (pads, with @x,y where several pads share a name; then routed paths per layer and width w, separated by ;. In a path a pad name is that pad's centre, name@x,y a point inside that pad or via, vN(x,y) a via of type N, cw(c..) or ccw(c..) an arc to the next point about the centre after c; other vN are vias at no path point)
+5: C9.1 C10.2 IC?.27 J10.1 R1.1 R3.1 TP6.1
\S\D\/OD: IC?.25 R4.2 TP9.1
ACF_CH1+: C12.1 C13.1 C14.1 C19.1 C20.1 IC2.1 IC2.5 J2.1 J2.2 L1.13 TP5.1 TP8.1
ACF_CH1-: L1.8 L1.9 Q1.4 R7.2
ACF_CH2+: C18.1 C28.1 C29.1 C30.1 C31.1 IC4.1 IC4.5 J6.1 J6.2 L1.12 TP10.1
ACF_CH2-: Q2.4 R13.2
CSF: IC3.8 NT2.1
GND: C4.1 C5.2 C6.2 C7.2 C8.2 C9.2 C10.1 C25.1 C26.1 C27.1 C32.2 C33.2 IC3.9 IC?.28 IC?.MP1 J3.1 J3.2 J5.2 J5.3 J5.4 J5.5 J7.2 J7.3 J7.4 J7.5 J9.2 J9.3 J9.4 J9.5 J10.2 NT1.1 NT1.2 R2.2 R10.2 R11.1 R12.1 R15.1 R16.1 RT1.1 TP3.1 TP4.1
GND_USB1: C12.2 C13.2 C14.2 C16.1 C19.2 C20.2 C28.2 C29.2 C30.2 C31.2 C32.1 IC2.2 J4.1 J4.2 Q1.3 R8.1 TP11.1
GND_USB2: C18.2 C23.1 C33.1 IC4.2 J8.1 J8.2 Q2.3 R18.1 TP12.1
HIN: IC?.26 R6.2 R14.2
LIN: IC?.24 R5.2 R17.2
NetC1_1: C1.1 C3.1 IC?.22
NetC1_2: C1.2 C3.2 IC?.21
NetC2_2: C2.2 C4.2 C5.1 C6.1 C7.1 C8.1 L1.1 L1.2
NetC11_1: C11.1 C11.2 C15.1 C15.2 IC?.1 IC?.3 R1.2
NetC16_2: C16.2 IC2.4 R8.2
NetC17_2: IC3.4 R11.2 RT1.2
NetC21_2: IC3.13 R15.2
NetC22_2: IC3.6 R16.2
NetC23_2: C23.2 IC4.4 R18.2
NetC24_1: IC3.11
NetC25_2: C25.2 J5.1 R3.2 R4.1
NetC26_2: C26.2 J7.1 R6.1
NetC27_2: C27.2 J9.1 R5.1
NetD3_2: F1.1 J1.1 J1.2
NetIC2_3: IC2.3 Q1.1
NetIC2_6: IC2.6 R7.1
NetIC3_1: IC3.1 R9.1
NetIC3_5: IC3.5 R12.2
NetIC3_10: IC3.10 R17.1
NetIC3_12: IC3.12 R14.1
NetIC3_16: IC3.16 R10.1
NetIC4_3: IC4.3 Q2.1
NetIC4_6: IC4.6 R13.1
NetIC5_1: IC5.1 IC6.1
NetIC5_4: IC5.4 IC6.2
NetIC?_2: IC?.2 TP7.1
NetIC?_4: IC?.4 IC?.5 IC?.6 IC?.7 IC?.8 IC?.9 IC?.10 IC?.11 IC?.MP2 NT2.2 R2.1
NetIC?_12: IC?.12 IC?.13 IC?.14 IC?.MP3 L1.6
NetIC?_20: IC?.20 TP1.1
NetL1_3: L1.3 L1.4
VIN: C2.1 F1.2 IC?.15 IC?.16 IC?.17 IC?.18 IC?.19 R9.2 TP2.1
pads on no net: IC3.2 IC3.3 IC3.7 IC3.14 IC3.15 IC5.2 IC5.3 IC6.3 IC?.23 IC?.29 IC?.30 IC?.31 L1.5 L1.7 L1.10 L1.11